# EAGLE board main-v4-2.1 (EAGLE 9.6.2)
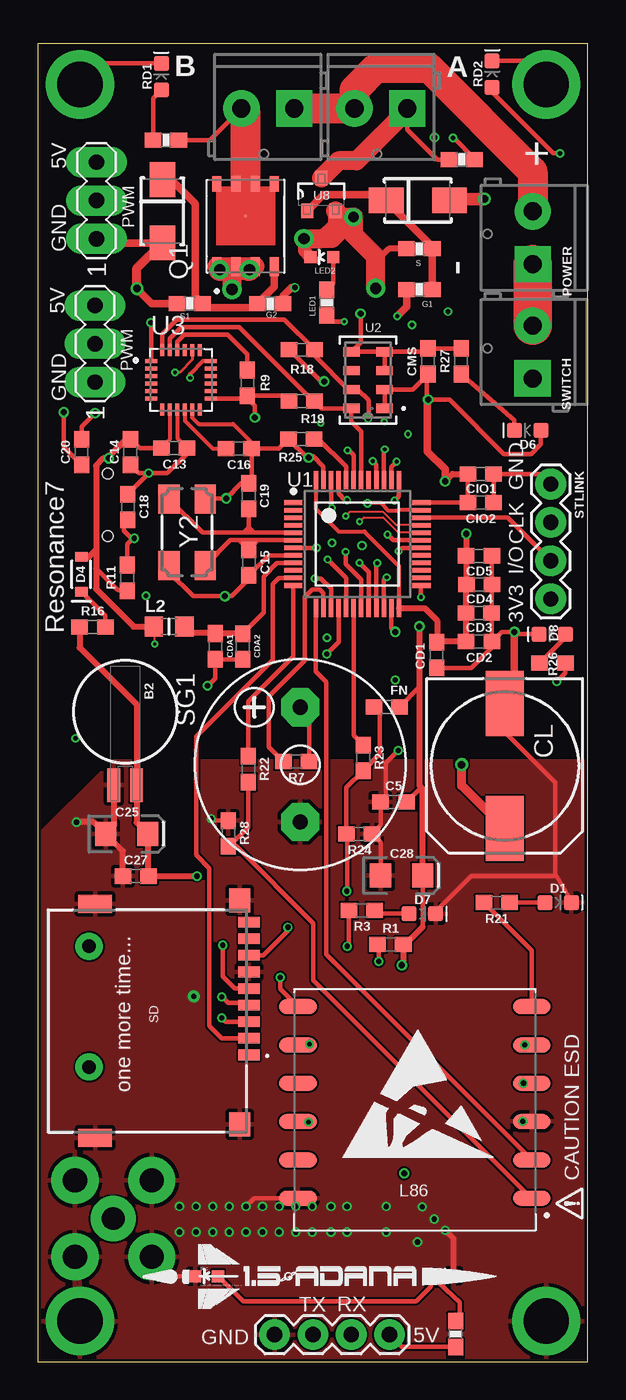
[diagram p0: board, top side]
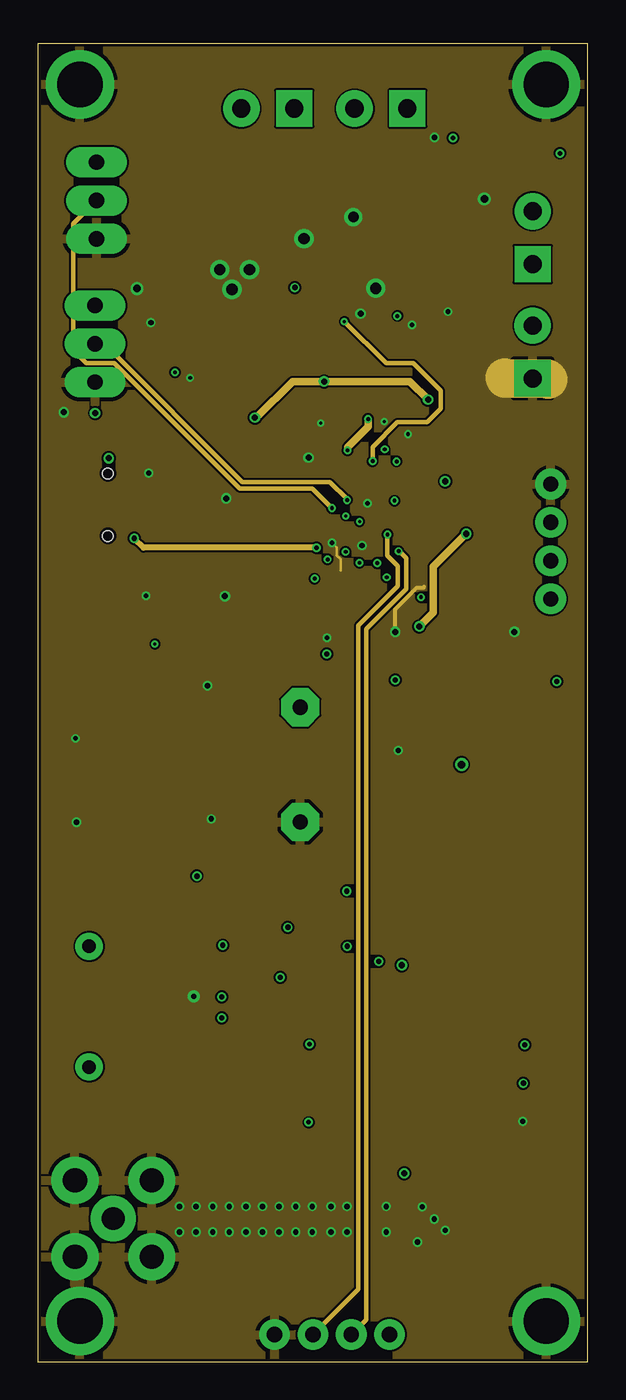
[diagram p1: board, inner layer Route2]
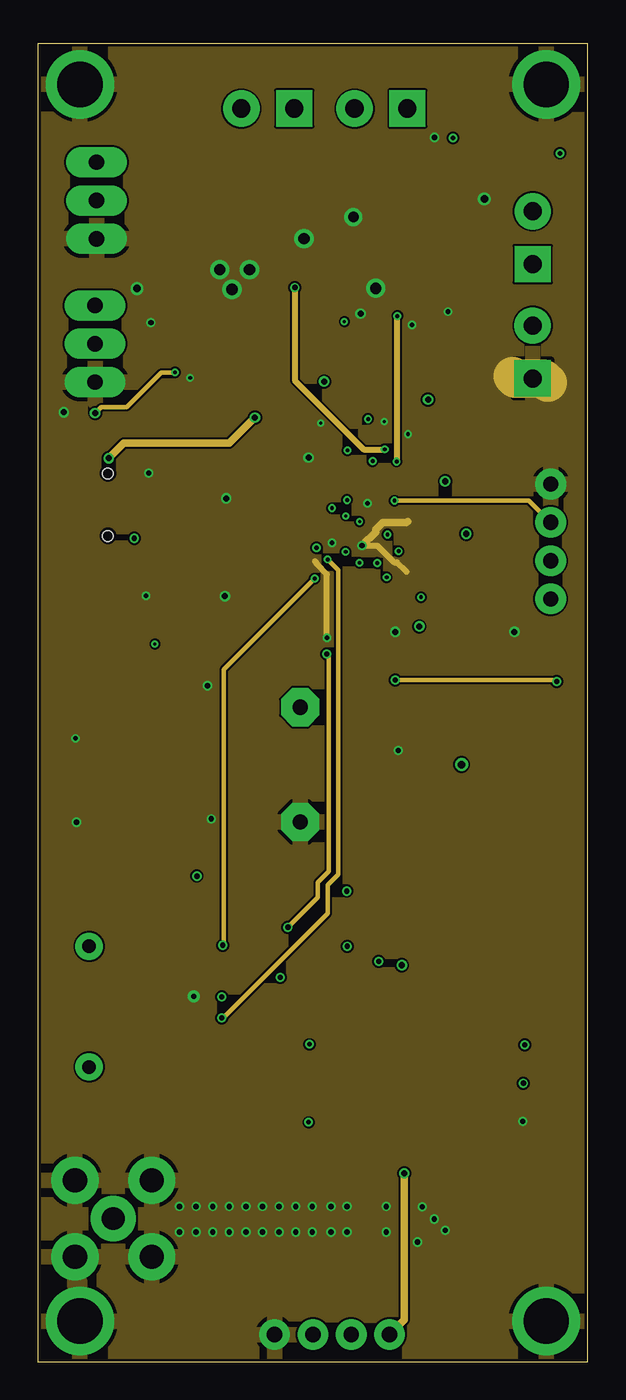
[diagram p2: board, inner layer Route15]
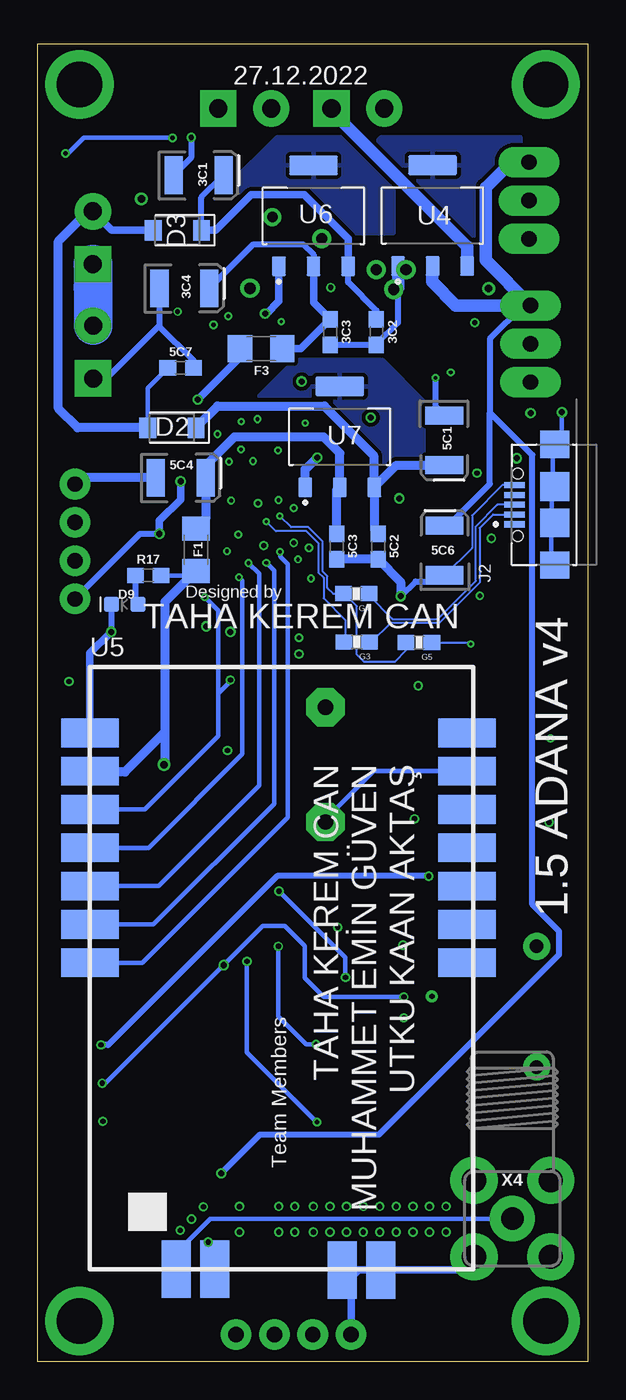
[diagram p3: board, bottom side, seen from below]

Size 36.47 x 87.4 mm. Coordinates in mm from the lower left corner, seen from the top.
Outline: 0,0 36.47,0 36.47,87.4 0,87.4 0,0
Copper layers (1+2*15+16): Top 0.035mm / dielectric 0.2104mm / Route2 0.0152mm / dielectric 1.065mm / Route15 0.0152mm / dielectric 0.2104mm / Bottom 0.035mm
Design rules "jlcpcb-4layers-edit *": minimum track width 3.5mil, minimum drill 0.2mm, track to track 5mil, track to pad 0.2mm, pad to pad 5mil, via to via 0.5mm, smd to smd 5mil, copper to edge 0.2mm, drill to drill 6mil, minimum pad ring 10mil, minimum via ring 0.13mm, stop-mask expansion 0.05mm, vias tented up to drill 0.25mm, thermal gap 10mil

## Footprints (pad centres in the part's own frame; a part is rotated, then mirrored left to right if it is on the bottom)
EIA3528 = smd 1.2 x 2.5: A 1.65,0; C -1.65,0
0603 = smd 1.1 x 1: 1 -0.85,0; 2 0.85,0
SCREWTERMINAL-3.5MM-2-NS = drill 1.2 pad 2.032 square: 1 0,0 | drill 1.2 pad 2.032: 2 3.5,0
0603-RES = smd 1.1 x 1: 1 -0.85,0; 2 0.85,0
BATTCON-6.8MM = smd 2.25 x 0.85: + 4.87,0.75; - 4.87,-0.75
EIA3216 = smd 1.4 x 1.6: + 1.4,0; - -1.4,0
150CLZ-1010 = smd 4.3 x 2.5: + 4.15,0; - -4.15,0
LED-0603 = smd 1 x 1: A -0.877,0; C 0.877,0
SODFL3718X115 = smd 1.115 x 1.361: 1 -1.6,0; 2 1.6,0
SOD-323 = smd 0.63 x 0.83: A 1.15,0; C -1.15,0
WE-TVSP_DO-214AC_UNIDIRECTIONAL = smd 2.3 x 1.7: 1 -2.1,0; 2 2.1,0
1206 = smd 1.6 x 1.8: 1 -1.4,0; 2 1.4,0
WE_629105136821 = smd 0.4 x 1.35: 1 -1.3,2.675; 2 -0.65,2.675; 3 0,2.675; 4 0.65,2.675; 5 1.3,2.675 | smd 1.8 x 1.9: S1 -4,0; S4 4,0 | smd 1.9 x 1.9: S2 -1.2,0; S3 1.2,0 | hole 0.7: -2.075,2.45; 2.075,2.45
RC-MASTER-SMD_L0805MP = smd 1.2 x 1.3: 1 -1.016,0; 2 1.016,0
XCVR_L86 = smd 2.5 x 1: 1 -7.75,6.35; 2 -7.75,3.81; 3 -7.75,1.27; 4 -7.75,-1.27; 5 -7.75,-3.81; 6 -7.75,-6.35; 7 7.75,-6.35; 8 7.75,-3.81; 9 7.75,-1.27; 10 7.75,1.27; 11 7.75,3.81; 12 7.75,6.35
LED-0603' = smd 0.8 x 0.8: A 0,-0.75; C 0,0.75
TRANS_SI7463DP = smd 1.27 x 0.61: 1 -2.67,1.905; 2 -2.67,0.635; 3 -2.67,-0.635; 4 -2.67,-1.905 | smd 1.02 x 0.61: 5 2.795,-1.905; 6 2.795,-0.635; 7 2.795,0.635; 8 2.795,1.905 | smd 0.15 x 0.15: 9 0.69,0
L-KLS1-TF-003-H1.85-R = smd 0.7 x 1.4: 1 2.25,10.6; 2 1.15,10.6; 3 0.05,10.6; 4 -1.05,10.6; 5 -2.15,10.6; 6 -3.25,10.6; 7 -4.35,10.6; 8 -5.45,10.6; 9 -6.55,10.6 | smd 1.6 x 1.4: 10 -8,10; 13 6.85,10 | smd 1.2 x 2.2: 11 -7.75,0.4; 12 7.75,0.4 | drill 0.9 pad 1.4: 14 3.05,0; 15 -4.95,0
F/CM12P = drill 1.016 pad 2.54 octagon: + 3.81,0; - -3.81,0
1X04 = drill 1.016 pad 1.88: 1 0,0; 2 2.54,0; 3 5.08,0; 4 7.62,0
MA03-1 = drill 1.016 long: 1 -2.54,0; 2 0,0; 3 2.54,0
STMICROELECTRONICS_STM32F072C8T6_0 = smd 1.2 x 0.3: 1 -4.25,2.75; 2 -4.25,2.25; 3 -4.25,1.75; 4 -4.25,1.25; 5 -4.25,0.75; 6 -4.25,0.25; 7 -4.25,-0.25; 8 -4.25,-0.75; 9 -4.25,-1.25; 10 -4.25,-1.75; 11 -4.25,-2.25; 12 -4.25,-2.75; 25 4.25,-2.75; 26 4.25,-2.25; 27 4.25,-1.75; 28 4.25,-1.25; 29 4.25,-0.75; 30 4.25,-0.25; 31 4.25,0.25; 32 4.25,0.75; 33 4.25,1.25; 34 4.25,1.75; 35 4.25,2.25; 36 4.25,2.75 | smd 0.3 x 1.2: 13 -2.75,-4.25; 14 -2.25,-4.25; 15 -1.75,-4.25; 16 -1.25,-4.25; 17 -0.75,-4.25; 18 -0.25,-4.25; 19 0.25,-4.25; 20 0.75,-4.25; 21 1.25,-4.25; 22 1.75,-4.25; 23 2.25,-4.25; 24 2.75,-4.25; 37 2.75,4.25; 38 2.25,4.25; 39 1.75,4.25; 40 1.25,4.25; 41 0.75,4.25; 42 0.25,4.25; 43 -0.25,4.25; 44 -0.75,4.25; 45 -1.25,4.25; 46 -1.75,4.25; 47 -2.25,4.25; 48 -2.75,4.25
SON8_MS5611_TEC = smd 1.092 x 0.61: 1 -1.1,1.875; 2 -1.1,0.625; 3 -1.1,-0.625; 4 -1.1,-1.875; 5 1.1,-1.875; 6 1.1,-0.625; 7 1.1,0.625; 8 1.1,1.875
QFN50P400X400X95-24N = smd 0.79 x 0.26: 1 -1.97,1.25; 2 -1.97,0.75; 3 -1.97,0.25; 4 -1.97,-0.25; 5 -1.97,-0.75; 6 -1.97,-1.25; 13 1.97,-1.25; 14 1.97,-0.75; 15 1.97,-0.25; 16 1.97,0.25; 17 1.97,0.75; 18 1.97,1.25 | smd 0.26 x 0.79: 7 -1.25,-1.97; 8 -0.75,-1.97; 9 -0.25,-1.97; 10 0.25,-1.97; 11 0.75,-1.97; 12 1.25,-1.97; 19 1.25,1.97; 20 0.75,1.97; 21 0.25,1.97; 22 -0.25,1.97; 23 -0.75,1.97; 24 -1.25,1.97
SOT229P700X180-4N = smd 0.93 x 1.31: 1 -2.29,-3.345; 2 0,-3.345; 3 2.29,-3.345 | smd 3.24 x 1.31: 4 0,3.345
E32-868T30S = smd 3.81 x 1.905: 3V3 12.3,5.08; AUX -12.7,7.62; GND@0 -12.7,12.7; GND@1 12.3,10.16; M0 -12.7,-2.54; M1 -12.7,0; PB0 12.3,-2.54; PB1 12.3,0; PB3 12.3,2.54; RST 12.3,12.7; RX -12.7,2.54; SWIM 12.3,7.62; TX -12.7,5.08; VCC -12.7,10.16 | smd 1.905 x 3.81: ANT -6.97,-22.86; GND@2 6.57,-22.91; GND@3 4.03,-22.91; GND@4 -4.43,-22.86
SOT95P240X112-3N = smd 0.972 x 0.802: D 1.092,0; G -1.092,0.94; S -1.092,-0.94
DELIK = drill 3 pad 4.5: P$1 0,0
SMA90_DIP = drill 1.5 pad 2.54: ANTENNA 0,0 | drill 1.6 pad 2.54: GND1 -2.54,2.54; GND2 2.54,2.54; GND3 -2.54,-2.54; GND4 2.54,-2.54
OSCCC500X320X110-4N = smd 1.9 x 1.4: 1 -2.2,-1.2; 2 2.2,-1.2; 3 2.2,1.2; 4 -2.2,1.2

## Placement (x,y rotation side)
3C1  22uF  [EIA3528]  25.8,78.68 0 bottom
3C2  100nF  [0603]  14.02,68.28 270 bottom
3C3  100nF  [0603]  17.09,68.27 270 bottom
3C4  22uF  [EIA3528]  26.75,71.18 0 bottom
5C1  22uF  [EIA3528]  9.53,61.1 270 bottom
5C2  100nF  [0603]  13.91,54.06 270 bottom
5C3  100nF  [0603]  16.66,54.06 270 bottom
5C4  22uF  [EIA3528]  26.99,58.62 0 bottom
5C6  22uF  [EIA3528]  9.5,53.8 90 bottom
5C7  100nF  [0603]  27,65.9 0 bottom
A  [SCREWTERMINAL-3.5MM-2-NS]  24.5,83.1 180 top
APGLED  4.7k  [0603-RES]  28.11,79.71 180 top
APGLED1  4.7k  [0603-RES]  8.5,81 0 top
B  [SCREWTERMINAL-3.5MM-2-NS]  17,83.1 180 top
B2  6.8MM_COIN_CELL  [BATTCON-6.8MM]  5.8,43.1 270 top
C5  100nF  [0603]  23.58,37.12 0 top
C13  100nF  [0603]  9.05,60.58 180 top
C14  10nF  [0603]  6.15,60.31 90 top
C15  25pF  [0603]  14,53 270 top
C16  100nF  [0603]  13.33,60.55 180 top
C18  0.1uF  [0603]  5.98,56.68 270 top
C19  25pF  [0603]  14,57.4 90 top
C20  2.2nF  [0603]  2.91,60.31 90 top
C25  4.7uF  [EIA3216]  5.9,35 0 top
C27  100nF  [0603]  6.5,32.2 0 top
C28  10uF  [EIA3216]  24.12,32.25 0 top
CD1  4.7uF  [0603]  26.44,46.86 90 top
CD2  0.1uF  [0603]  29.25,47.76 180 top
CD3  0.1uF  [0603]  29.24,49.66 180 top
CD4  0.1uF  [0603]  29.26,51.54 180 top
CD5  0.1uF  [0603]  29.25,53.44 180 top
CDA1  1uF  [0603]  11.78,47.44 270 top
CDA2  10nF  [0603]  13.58,47.43 270 top
CIO1  4.7uF  [0603]  29.36,58.86 180 top
CIO2  0.1uF  [0603]  29.36,56.98 180 top
CL  1000uF  [150CLZ-1010]  30.95,39.51 270 top
CMS  100nF  [0603]  25.87,66.34 90 top
D1  [LED-0603]  34.49,30.45 0 top
D2  B5819W  [SODFL3718X115]  27.58,61.93 180 bottom
D3  B5819W  [SODFL3718X115]  27.22,75.02 180 bottom
D4  0.5A/40V/420mV  [SOD-323]  2.89,52.21 90 top
D6  [LED-0603]  32.47,61.76 180 top
D7  [LED-0603]  25.5,29.7 0 top
D8  [LED-0603]  34.11,48.24 180 top
D9  [LED-0603]  30.71,50.23 180 bottom
ESDA  12V  [WE-TVSP_DO-214AC_UNIDIRECTIONAL]  25.2,77 0 top
ESDA1  12V  [WE-TVSP_DO-214AC_UNIDIRECTIONAL]  8.26,76.28 270 top
F1  1A  [1206]  25.98,53.84 270 bottom
F3  0.75A  [1206]  21.66,67.17 180 bottom
FN  1k  [0603]  23.14,43.42 180 top
G1  2.2K  [0603-RES]  25.3,71.1 180 top
G2  22  [0603-RES]  15.41,70.15 0 top
G3  22  [0603-RES]  15.32,47.73 180 bottom
G4  22  [0603-RES]  15.36,50.93 180 bottom
G5  22  [0603-RES]  11.2,47.7 180 bottom
J2  629105136821  [WE_629105136821]  2.2,56.83 90 bottom
L2  [RC-MASTER-SMD_L0805MP]  8.71,48.75 0 top
L86  L86  [XCVR_L86]  25,17.2 180 top
LED1  1k  [0603-RES]  19.17,70.22 90 top
LED2  RED  [LED-0603']  18.83,73.25 90 top
LED3  1k  [0603-RES]  27.7,1.84 90 top
LED5  GREEN  [LED-0603']  11.2,5.68 90 top
LED6  GREEN  [LED-0603']  26.81,5.69 270 top
POWER  [SCREWTERMINAL-3.5MM-2-NS]  32.81,72.78 90 top
Q1  SI7463DP  [TRANS_SI7463DP]  13.78,75.29 90 top
R1  1k  [0603]  23.38,27.67 0 top
R3  1k  [0603]  21.48,29.94 180 top
R7  1k  [0603]  17.14,39.8 180 top
R9  1k  [0603]  13.9,64.9 270 top
R11  1k  [0603]  5.93,51.98 90 top
R16  1k  [0603]  3.63,48.71 0 top
R17  1k  [0603]  29.15,52.14 0 bottom
R18  1k  [0603]  17.5,67.1 180 top
R19  1k  [0603]  17.5,63.7 180 top
R21  1k  [0603]  30.42,30.45 180 top
R22  1k  [0603]  13.96,39.29 270 top
R23  1k  [0603]  21.57,40.04 270 top
R24  1k  [0603]  21.31,35.01 180 top
R25  1k  [0603]  17.46,61.19 180 top
R26  1k  [0603]  34.12,46.34 0 top
R27  1k  [0603]  28.06,66.34 90 top
R28  1k  [0603]  12.64,35.04 270 top
RD1  Blue  [LED-0603]  8.19,85.21 90 top
RD2  Blue  [LED-0603]  30.12,85.38 90 top
S  3.3K  [0603-RES]  25.3,73.8 180 top
S1  4.7k  [0603-RES]  10.08,70.17 180 top
SD  L-KLS1-TF-003-H1.85-R  [L-KLS1-TF-003-H1.85-R]  3.4,22.6 270 top
SG1  F/CM12P  [F/CM12P]  17.4,39.6 90 top
STLINK  [1X04]  34,58.2 270 top
SV1  [MA03-1]  3.8,67.5 90 top
SV2  [MA03-1]  3.9,77 90 top
SWITCH  [SCREWTERMINAL-3.5MM-2-NS]  32.8,65.2 90 top
U1  STMICROELECTRONICS_STM32F072C8T6STMICROELECTRONICS_STM32F072C8T6_0_0  [STMICROELECTRONICS_STM32F072C8T6_0]  21.19,54.22 0 top
U2  MS561101BA03-50  [SON8_MS5611_TEC]  21.89,65.09 180 top
U3  MPU-6050  [QFN50P400X400X95-24N]  9.5,65.1 0 top
U4  AMS1117-5.0  [SOT229P700X180-4N]  10.3,76 0 bottom
U5  [E32-868T30S]  20.31,29 0 bottom
U6  AMS1117-3.3  [SOT229P700X180-4N]  18.19,75.98 0 bottom
U7  AMS1117-5.0  [SOT229P700X180-4N]  16.45,61.33 0 bottom
U8  SI2308CDS-T1-GE3  [SOT95P240X112-3N]  18.8,77.4 90 top
U$1  3MM  [DELIK]  2.8,2.7 0 top
U$2  3MM  [DELIK]  33.7,2.7 0 top
U$3  3MM  [DELIK]  2.8,84.7 0 top
U$5  3MM  [DELIK]  33.7,84.7 0 top
U$6  [ESD_10.00]  20.11,13.42 0 top
U$7  [1.5-2]  6.97,0.86 0 top
U$8  [ESD]  36.16,9.46 90 top
UART  [1X04]  15.7,1.8 0 top
X4  [SMA90_DIP]  5.01,9.49 0 bottom
Y2  ABM3B-26.000MHZ-10-1-U-T  [OSCCC500X320X110-4N]  9.9,55 270 top

## Library data of the parts
3C1 3C4 5C1 5C4 5C6 = SparkFun-Capacitors; PROD_ID: CAP-08310
3C2 3C3 5C2 5C3 5C7 C5 C13-C16 C18-C20 C27 CD1-CD5 CIO1 CIO2 = SparkFun-Capacitors; PROD_ID: CAP-00868
A B POWER SWITCH = SparkFun-Connectors; PROD_ID: CONN-08399
APGLED APGLED1 G1-G5 LED1 LED3 S S1 = SparkFun-Resistors; PROD_ID: RES-08296
B2 = SparkFun-Batteries; PROD_ID: BATT-13734
C25 C28 = SparkFun-Capacitors; PROD_ID: CAP-00811
CDA1 CDA2 CMS = SparkFun-Capacitors; PROD_ID: CAP-00810
CL X4 = adafruit
D1 D6-D9 = SparkFun-LED
D2 D3 = Diode; CATEGORY: Diode; DESCRIPTION: DIODE SCHOTTKY 20V 500MA SOD123; MANUFACTURER: ON Semiconductor; MPN: MBR0520LT1G; SUB-CATEGORY: Schottky
D4 = SparkFun-DiscreteSemi; PROD_ID: DIO-10955
ESDA ESDA1 = Wurth_EMC Components_WE-TVSP; DATASHEET-URL: https://www.we-online.com/catalog/datasheet/824500102.pdf; IPEAK: 2.5A; MOUNT: SMT; PART-NUMBER: 824500102; PDISS: 400W; VBR: 117V; VCLAMP: 162V
F1 F3 = SparkFun-Fuses; PROD_ID: RES-08585
FN R1 R3 R7 R9 R11 R16-R19 R21-R28 = SparkFun-Resistors; PROD_ID: RES-07856
J2 = 629105136821; AVAILABILITY: In Stock; DESCRIPTION: USB - micro B USB 2.0 Receptacle Connector 5 Position Surface Mount, Right Angle; MF: Würth Elektronik; MP: 629105136821; PACKAGE: None; PRICE: None; PURCHASE-URL: https://pricing.snapeda.com/search/part/629105136821/?ref=eda
L2 = 52101-101-REV-A_v16
L86 = L86; AVAILABILITY: Unavailable; DESCRIPTION: L86 is an ultra-compact GNSS POT (Patch on Top) module with an embedded 18.4mm × 18.4mm × 4.0mm patch antenna and utilizes the MediaTek new generation GNSS chipset MT3333 that achieves the perfect performance; MF: Quectel; MP: L86; PACKAGE: PowerSFN-8 Quectel; PRICE: None
LED2 LED5 LED6 = SparkFun-LED; PROD_ID: DIO-00819
Q1 = KARTSON-RE; AVAILABILITY: In Stock; DESCRIPTION: P-Channel 40 V 11A (Ta) 1.9W (Ta) Surface Mount PowerPAK® SO-8; MF: Vishay; MP: SI7463DP; PACKAGE: SO-8 Vishay; PRICE: None; PURCHASE-URL: https://pricing.snapeda.com/search/part/SI7463DP/?ref=eda
RD1 RD2 = SparkFun-LED; PROD_ID: DIO-11154
SD = L-KLS1-TF-003-H1.85-R; DESCRIPTION: Micro SD Card Connector; HEIGHT: mm; MANUFACTURER_NAME: KLS Electronic; MANUFACTURER_PART_NUMBER: L-KLS1-TF-003-H1.85-R
SG1 = buzzer; OC_FARNELL: unknown; OC_NEWARK: unknown
STLINK UART = SparkFun-Connectors; PROD_ID: CONN-09696
SV1 SV2 = con-lstb; OC_FARNELL: unknown; OC_NEWARK: unknown
U1 = STMicroelectronics - STM32F072C8T6; CENTROID_NOT_SPECIFIED: No; DATASHEET: https://upverter.com/datasheet/79bc43d7022f169b66e7860c54ba7646fa9c2dde.pdf; DIGIKEY_DESCRIPTION: IC MCU 32BIT 64KB FLASH 48LQFP; DIGIKEY_PART_NUMBER: STM32F072C8T6-ND; LEAD_FREE: yes; MF: STMicroelectronics; MOUSER_PART_NUMBER: 511-STM32F072C8T6; MPN: STM32F072C8T6; PACKAGE: LQFP48; PREFIX: U; ROHS: yes; TEMPERATURE_RANGE_HIGH: +85°C; TEMPERATURE_RANGE_LOW: -40°C
U2 = MS5611; BUILT_BY: EMA_UL_Team; COPYRIGHT: Copyright (C) 2016 Accelerated Designs. All rights reserved; DESCRIPTION: MS5611 BAROMETRIC SENSOR CM T&R; MANUFACTURER_PART_NUMBER: MS561101BA03-50; OUTPUT-SPAN: 24 bit ADC; PACKAGE: Surface Mountable; PRODUCT_DESCRIPTION: MS5611 BAROMETRIC SENSOR CM T&R; PRODUCT_TYPE: -; SENSOR_TYPE: Digital Pressure and Altimeter Sensor Modules; SOURCELIBRARY: TE_Connectivity-2018-03-16; SUPPLY_VOLTAGE: 1.8  3.6; TE_PART_NUMBER: MS561101BA03-50; VENDOR: TE Connectivity
U3 = MPU-6050; AVAILABILITY: Warning; DESCRIPTION: Accelerometer, Gyroscope, 6 Axis Sensor I²C Output; MF: TDK InvenSense; MP: MPU-6050; PACKAGE: QFN-24 InvenSense; PRICE: None; PURCHASE-URL: https://pricing.snapeda.com/search/part/MPU-6050/?ref=eda
U4 U6 U7 = AMS1117-3.3; AVAILABILITY: Unavailable; DESCRIPTION: Sot223/Pkg 1-Amp 3.3-Volt Low Drop Out Voltage Regulatator; MF: Advanced Monolithic Systems; MP: AMS1117-3.3; PACKAGE: SOT-89 ams; PRICE: None
U5 = E32-868T30S
U8 = IRLML6344TRPBF; AVAILABILITY: Good; DESCRIPTION: N-Channel 30V 5A (Ta) 1.3W (Ta) Surface Mount Micro3™/SOT-23; MF: Infineon Technologies; MP: IRLML6344TRPBF; PACKAGE: SOT-23 Multicomp; PRICE: None; PURCHASE-URL: https://pricing.snapeda.com/search/part/IRLML6344TRPBF/?ref=eda
U$1-U$3 U$5 U$7 U$8 = KARTSON-RE
U$6 = logo
Y2 = ABM3B-26.000MHZ-10-1-U-T; AVAILABILITY: Good; DESCRIPTION: 26MHz ±10ppm Crystal 10pF 50 Ohms 4-SMD, No Lead; MF: Abracon; MP: ABM3B-26.000MHZ-10-1-U-T; PACKAGE: SMD-4 Abracon LLC; PRICE: None; PURCHASE-URL: https://pricing.snapeda.com/search/part/ABM3B-26.000MHZ-10-1-U-T/?ref=eda

## Nets
3.3V: C5.2 C13.2 C14.2 C28.+ CD1.2 CD2.2 CD3.2 CD4.2 CD5.2 CIO1.2 CIO2.2 CMS.1 D4.A D6.A F3.2 FN.1 G5.1 L2.1 L86.4 R1.2 R9.2 R11.1 R18.2 R19.2 SD.4 STLINK.4 U1.24 U1.36 U1.48 U2.1 U2.2 U3.8 U3.13
5V: CL.+ F1.2 R17.2 U5.VCC
5VS: 5C6.A LED3.1 SV1.3 SV2.3 U4.2 UART.4
AUX: R26.2 U1.25 U5.AUX
BOOT: R25.1 U1.44
BUZZER: R7.2 U1.14
CS: SD.2 U1.11
DAT1: SD.8
DAT2: SD.1
DATA_N: G3.2 U1.32
DATA_P: G4.2 G5.2 U1.33
FIREA: G1.2 U1.38
FIREB: G2.2 U1.39
FN: R23.1 U1.18
GND: 3C1.C 3C2.2 3C3.2 3C4.C 5C1.C 5C2.2 5C3.2 5C4.C 5C6.C 5C7.2 B2.- C5.1 C13.1 C14.1 C15.2 C16.1 C18.1 C19.2 C20.1 C25.- C27.1 C28.- CD1.1 CD2.1 CD3.1 CD4.1 CD5.1 CDA1.2 CDA2.2 CIO1.1 CIO2.1 CL.- CMS.2 D1.C D7.C D8.C D9.C ESDA1.2 ESDA.2 J2.5 J2.S1 J2.S2 J2.S3 J2.S4 L86.3 L86.12 LED2.C LED5.C LED6.C Q1.1 Q1.2 Q1.3 R24.1 R25.2 R27.2 R28.1 RD1.C RD2.C S1.2 S.2 SD.6 SD.10 SD.11 SD.12 SD.13 SG1.- STLINK.1 SV1.1 SV2.1 SWITCH.1 U1.8 U1.23 U1.35 U1.47 U2.3 U2.4 U2.5 U3.1 U3.9 U3.11 U3.18 U4.1 U5.GND@0 U5.GND@1 U5.GND@2 U5.GND@3 U5.GND@4 U6.1 U7.1 U8.S U$1.P$1 U$2.P$1 U$3.P$1 U$5.P$1 UART.1 X4.GND1 X4.GND2 X4.GND3 X4.GND4 Y2.2 Y2.4
HT: U7.4
HT1: U4.4
HT2: U6.4
INT: U3.12
LED2: LED1.1 U1.40
M0: U1.19 U5.M0
M1: U1.20 U5.M1
MISO: SD.7 U1.16
MOSI: SD.3 U1.17
N$1: 5C1.A 5C2.1 D2.1 U7.3
N$2: ESDA.1 G1.1 S.1 U8.G
N$3: L86.10 R1.1
N$4: 5C3.1 5C4.A F1.1 U7.2
N$5: 3C1.A 3C2.1 D3.1 U6.3
N$6: 3C3.1 3C4.A F3.1 U6.2
N$7: U5.ANT X4.ANTENNA
N$8: APGLED.1 RD2.A
N$9: POWER.1 SWITCH.2
N$10: L86.6 R21.2
N$11: D1.A R21.1
N$12: D4.C R16.2
N$13: ESDA1.1 G2.1 Q1.4 S1.1
N$14: D9.A R17.1
N$15: D6.C R27.1
N$16: L86.8 R3.2
N$17: D7.A R3.1
N$18: C16.2 U3.10
N$19: APGLED1.1 RD1.A
N$21: D8.A R26.1
N$22: C20.2 U3.20
N$24: R7.1 SG1.+
N$25: J2.4
N$26: LED1.2 LED2.A
N$27: LED3.2 LED5.A LED6.A
N$30_N: G3.1 J2.2
N$30_P: G4.1 J2.3
N$34: SD.9
NF: FN.2 L86.7 R23.2 R24.2
OSCIN: C19.1 U1.5 Y2.1
OSCOUT: C15.1 U1.6 Y2.3
PIN22: R9.1 U3.22
PWM1: SV1.2 U1.45
PWM2: SV2.2 U1.46
RST: C18.2 R11.2 U1.7
RX1: U1.30 UART.3
RX2: L86.2 U1.13
RX3: U1.22 U5.TX
SCK: SD.5 U1.15
SCL: R19.1 U1.42 U2.8 U3.23
SDA: R18.1 U1.43 U2.7 U3.24
SWCLK: STLINK.2 U1.37
SWDIO: STLINK.3 U1.34
TX1: U1.31 UART.2
TX2: R22.1 U1.12
TX3: U1.21 U5.RX
TXD: L86.1 R22.2 R28.2
V_BCKP: B2.+ C25.+ C27.2 L86.5 R16.1
VAPG: A.1 APGLED.2 U8.D
VCC: 5C7.1 A.2 B.1 D2.2 D3.2 POWER.2 U4.3
VDDA: CDA1.1 CDA2.1 L2.2 U1.9
VMAIN: APGLED1.2 B.2 Q1.5 Q1.6 Q1.7 Q1.8 Q1.9
XANT: L86.11

## Tracks (layer width: path | path; a pad name or v marks a point on that pad's centre or on a via)
3.3V  (via drill 0.2, 0.35, 0.4)
  Top 0.127: v7.77,47.6 7.77,48.67 L2.1
  Top 0.254: U1.48 18.44,56.56 19.95,55.05 21.65,55.05 23.94,52.77 U1.24 | U3.8 8.75,61.13 C13.2
  Top 0.305: CD5.2 | 28.39,51.52 CD4.2 | CD3.2 | CD1.2 26.49,47.76 | R9.2 16.3,64.05 R19.2 | U2.1 U2.2 24.84,64.47 CMS.1 25.79,65.41 25.79,63.87 v25.87,63.79 27.31,63.79 30.9,60.2 32.7,60.2 33.35,60.85 D6.A | v18.98,65 18.78,65 16.68,67.1 R18.2 | R9.2 13.82,63.98 14.4,63.4 v14.4,62.6 | C28.+ 25.52,28.84 | L86.4 v32.19,18.47 | D4.A 2.91,53.38 | C5.2 25.41,38.09 | SD.4 13.87,23.78 12.62,23.78 v12.2,24.2 | CIO1.2 CIO2.2 U1.36 | R1.2 24.35,27.67 | R11.1 5.9,51.16 5.3,51.16 3.87,52.59 | C14.2 6.19,61.16 6.77,60.58 C13.2 | FN.1 25.3,44.73 25.3,45.23 | R9.2 13.7,63.85 U3.13
  Top 0.406: CD5.2 CD4.2 | CD3.2 28.39,51.52 | CD3.2 CD2.2 26.49,47.76 | v25.87,63.79 25.83,63.75 | v28.4,54.9 CD5.2 | L2.1 6.36,48.75 3.87,51.24 3.87,52.59 3.87,53.86 | C28.+ 25.52,37.98 25.41,38.09 25.3,38.2 25.3,45.23 v25.3,48.76 | v27,58.38 27.48,58.86 CIO1.2 | R1.2 24.23,26.39 v24.14,26.3 | 24.35,27.67 25.52,28.84 | CD1.2 26.48,47.75 26.48,49.14 25.65,49.97 U1.24 | 3.87,53.86 3.87,59.42 4.36,59.91 v4.71,59.91 4.71,60.02 5.85,61.16 C14.2 | D4.A 3.37,53.36 3.87,53.86
  Top 0.508: v27,58.38 27,59.2 25.83,60.36 25.83,63.75
  Route2 0.406: 14.5,62.6 v14.4,62.6
  Route2 0.508: v25.87,63.79 24.66,65 v18.98,65 16.9,65 14.5,62.6 | v25.3,48.76 26.23,49.69 26.23,52.73 v28.4,54.9
  Route15 0.508: v14.4,62.6 12.7,60.9 5.71,60.9 v4.71,59.91
  Bottom 0.127: G5.1 7.94,47.7 7.84,47.6 v7.77,47.6
  Bottom 0.305: v12.2,24.2 17.51,24.2 18.77,25.46 18.77,27.57 20.1,28.9 21.57,28.9 24.14,26.33 v24.14,26.3 32.02,18.42 32.14,18.42 v32.19,18.47
  Bottom 0.406: STLINK.4 29.68,54.9 v28.4,54.9
  Bottom 0.508: F3.2 23.06,66.6 v25.87,63.79 | v28.4,54.9 28.4,55.77 27,57.17 v27,58.38
5V  (via drill 0.5)
  Top 0.61: CL.+ 28.1,38.21 v28.1,39.6
  Bottom 0.305: R17.2 26.28,52.14 F1.2
  Bottom 0.61: F1.2 28.04,50.38 28.04,41.76 | U5.VCC 32.95,39.1 30.7,39.1 28.04,41.76 | 28.04,41.76 28.04,39.66 v28.1,39.6
5VS  (via drill 0.4)
  Top 0.305: UART.4 24.13,0.99 LED3.1
  Route15 0.508: v24.3,12.5 24.3,2.78 UART.4
  Bottom 0.305: 5C6.A 9.26,55.45
  Bottom 0.406: SV1.3 4.3,70.04 6.5,67.84 6.5,62.94 | 6.5,62.94 3.68,60.12 3.68,30.32 1.91,28.55 1.91,27 13.84,15.07 21.73,15.07 v24.3,12.5 | 6.5,62.94 6.5,58.21 9.26,55.45
  Bottom 0.61: U4.2 10.31,72.64 | 5.1,79.54 SV2.3
  Bottom 0.813: 10.31,72.64 10.31,71.6 8.75,70.04 SV1.3 6.79,73.03 6.79,77.85 5.1,79.54
AUX  (via drill 0.25, 0.35)
  Top 0.305: U1.25 25.4,51.43 v25.4,50.7 | R26.2 34.97,45.67 v34.4,45.1
  Route15 0.305: v23.7,45.2 34.3,45.2 v34.4,45.1
  Bottom 0.305: U5.AUX 29.38,36.62 24.5,41.5 24.5,44.3 | 24.5,44.3 24.5,49.8 v25.4,50.7 | 24.5,44.3 23.7,45.1 v23.7,45.2
BOOT
  Top 0.305: U1.44 20.44,59.36 18.61,61.19 R25.1
BUZZER
  Top 0.305: U1.14 18.94,50.96 18.7,51.2 18.2,51.2 17.7,50.7 17.7,46.51 15.31,44.12 15.31,40.75 16.27,39.8 R7.2
CS
  Top 0.305: U1.11 15.97,51.97 15.57,51.57 15.57,46.53 10.5,41.46 10.5,33.6 11.38,32.72 11.38,22.27 12.2,21.45 SD.2
DATA_N  (via drill 0.2)
  Top 0.127: U1.32 23.91,54.97 22.89,55.99 21.61,55.99 v21.33,55.71
  Bottom 0.127: v21.33,55.71 20.69,55.07 18.66,55.07 17.86,54.27 17.86,52.33 17.52,51.99 17.52,50.62 16.07,49.17 16.07,47.83 G3.2
DATA_P  (via drill 0.2)
  Top 0.127: U1.33 23.77,55.47 22.91,56.33 20.66,56.33 v20.42,56.09
  Bottom 0.127: v20.42,56.09 19.67,55.34 18.53,55.34 17.61,54.41 17.61,52.44 17.27,52.1 17.27,51.3 16.89,50.93 G4.2 16.14,50.93 15.32,50.11 15.32,46.89 14.84,46.41 12.82,46.41 12.05,47.18 G5.2
FIREA  (via drill 0.25)
  Top 0.305: v23.79,59.69 23.44,59.34 U1.38
  Top 0.508: G1.2 24.45,69.95 v23.84,69.34
  Route15 0.305: v23.84,69.34 23.8,69.3 | v23.79,59.69 v23.8,59.7
  Route15 0.406: 23.8,69.3 v23.8,59.7
FIREB  (via drill 0.25, 0.35)
  Top 0.305: U1.39 22.94,60.44 v23,60.5
  Top 0.508: v17.05,71.23 16.79,71.23 16.26,70.7 G2.2
  Route15 0.406: v17.05,71.23 17.05,65.06 21.61,60.5 v23,60.5
FN
  Top 0.305: U1.18 20.94,41.52 R23.1
GND  (via drill 0.2, 0.25, 0.3, 0.35, 0.35 pad 0.8, 0.4, 0.5, 0.7, 0.75)
  Top 0.254: U3.18 10.95,66.35 10.1,65.5 v10.1,65.24 | U3.11 10.24,62.62 10.68,62.18 12.96,62.18 14.18,60.95 C16.1 | U3.9 9.25,61.23 C13.1 | U1.35 23.95,56.47 23.9,56.42 23.27,56.42 22.77,56.92 v21.88,56.92 v21.87,56.93
  Top 0.305: CD5.1 CD4.1 30.11,49.98 30.1,49.97 CD3.1 | CD3.1 | CD2.1 CD3.1 | CD1.1 28.75,46.01 30.1,47.36 CD2.1 | CD2.1 30.74,48.4 v31.6,48.4 31.76,48.24 D8.C | 13.47,46.69 CDA2.2 CDA1.2 11.78,45.31 11.3,44.83 v11.25,44.83 | CIO2.1 CIO1.1 33.34,58.86 STLINK.1 | Y2.4 11.15,57.25 v12.5,57.25 13.5,58.25 C19.2 14.18,58.43 C16.1 15.97,60.55 R25.2 17.85,59.95 v17.95,59.95 18.05,60.05 18.26,60.05 18.94,59.37 U1.47 | Y2.2 8.7,52.37 10.31,50.76 v12.41,50.76 12.87,50.76 14,51.89 C15.2 15.32,53.47 U1.8 | U1.23 23.44,48.66 v23.7,48.4 | v21.4,69.5 21.4,67.58 U2.5 U2.4 | U2.4 25.64,66.97 CMS.2 R27.2 | v7.36,58.93 7.36,58.91 C18.1 | R28.1 11.61,35.89 v11.5,36 | D1.C 35.37,30.57 34.29,32.34 | 34.29,32.34 34.29,32.23 28.74,32.23 26.38,29.86 D7.C | 34.29,32.34 34.29,38.41 30.95,41.75 CL.- 31.6,44.31 | U3.1 7.53,68.87 v7.5,68.9 | U2.4 U2.3 | LED5.C 8.82,5.68 X4.GND3 | L86.12 14.35,10.85 v13.8,10.3 | RD2.C 32.14,86.26 U$5.P$1 | RD1.C 4.19,86.09 U$3.P$1 | C28.- 22.72,34.45 R24.1 22.73,35.58 C5.1 23.07,37.46 23.07,39.72 v23.89,40.54 | C14.1 6.68,58.93 v7.36,58.93 | C13.1 9.9,60.23 8.6,58.93 v7.36,58.93 | C20.1 1.73,60.65 v1.73,62.95
  Top 0.406: B2.- 5.05,35.55 C25.- | C27.1 5.65,33.85 C25.- | C25.- 3.72,35.78 v2.57,35.78 | C5.1 22.78,37.07 | 22.4,72.95 23.25,73.8 S.2 | LED6.C 27.56,8.18 v27.02,8.72
  Top 0.508: 31.6,44.31 v31.6,48.4 | S1.2 7.57,70.17 v6.58,71.16 | ESDA1.2 4.18,74.18 SV2.1
  Top 0.61: ESDA1.2 6.58,72.5 v6.58,71.16
  Top 0.813: ESDA.2 27.4,77.1 v29.6,77.1 | v17.65,74.47 17.65,73.68 LED2.C
  Top 1.016: U8.S 19.74,75.38 18.83,74.47
  Top 1.27: v22.4,71.18 22.4,72.95 22.4,73.27 20.92,74.75 v20.92,75.9 | v20.92,75.9 19.51,74.5 18.86,74.5 18.83,74.47 v17.65,74.47 | U8.S 20.15,75.9 v20.92,75.9 | v12.06,72.42 12.06,72.44 Q1.1 | v14.03,72.42 14.23,72.62 Q1.3 | Q1.2 12.87,72.34 v12.87,71.11
  Top 1.5: v14.03,72.42 13.97,72.42 13.9,72.49 12.13,72.49 v12.06,72.42
  Route2 0.152: 20.07,52.45 20.07,53.21 19.82,53.46 19.82,53.98 v19.5,54.3
  Route2 0.254: 25.6,51.38 25.56,51.34 25.14,51.34 23.7,49.9 v23.7,48.4
  Route2 2.54: 30.95,65.24 30.99,65.2 SWITCH.1 33.76,65.2 33.84,65.12
  Route15 0.406: 24.43,52.39 23.81,53.01 23.62,53.01 22.51,54.12 v21.49,54.12 | 18.37,53.08 18.48,52.97 18.48,52.9 19.16,52.21 v19.16,48.02
  Route15 0.508: v21.49,54.12 22.39,55.02 22.39,55.18 22.85,55.64 24.43,55.64 24.51,55.72
  Route15 2.54: 31.49,65.36 31.65,65.2 SWITCH.1 33.52,65.2 33.81,64.91
  Bottom 0.127: 5C6.C 7.68,53.97 7.68,56.11 5.64,58.16 4.9,58.16 J2.5
  Bottom 0.305: U5.GND@1 14.21,39.16 17.4,35.97 SG1.- | v1.73,62.95 1.73,61.66 2.41,60.97 J2.S4 2.32,60.74 2.32,58.12 J2.S3 2.39,58.01 2.39,55.65 J2.S2 2.42,55.62 2.42,52.84 J2.S1 | 2.47,41.35 v2.49,41.33
  Bottom 0.406: 3C4.C 28.4,68.72 28.43,68.69 | 3C3.2 3C2.2 14.02,67.47 12.59,68.9 12.59,71.22 | v26.3,81.18 26.3,79.83 3C1.C | 5C6.C 9.91,51.74 11.43,51.74 v12.41,50.76 | 28.43,68.69 26.15,66.4 5C7.2 | SWITCH.1 31.92,65.2 28.43,68.69 | D9.C 31.59,48.41 v31.6,48.4 | 5C1.C 10.1,63.32 v10.1,65.24
  Bottom 0.508: X4.GND3 8.41,6.09 U5.GND@2 15.2,6.09 | U5.GND@3 15.2,6.09 | U6.1 20.48,70.32 21.3,69.5 v21.4,69.5 | UART.1 15.7,5.59 15.2,6.09 | U5.GND@0 33.01,46.99 v31.6,48.4 | U5.GND@4 24.74,7.51 v25.17,7.94
  Bottom 0.61: U7.1 18.74,59.16 v17.95,59.95 | 5C3.2 5C2.2 12.41,51.71 v12.41,50.76 | 5C4.C 33.58,58.62 STLINK.1
  Bottom 0.813: U4.1 12.59,71.39 | 12.59,71.39 12.59,71.22 | 12.59,71.39 v12.87,71.11
  other vias: 11.6,8.6 10.5,8.6 9.4,8.6 10.5,10.3 9.4,10.3 11.6,10.3 12.7,8.6 12.7,10.3 13.8,8.6 14.9,8.6 14.9,10.3 16,8.6 17.1,8.6 18.2,8.6 20.5,10.3 20.5,8.6 23.1,10.3 23.1,8.6 25.49,10.27 26.28,9.47 24.82,68.76 10.34,24.23 24.55,61.51 19.44,8.6 19.44,10.3 7.17,50.79 27.19,69.63 16,10.3 17.1,10.3 18.2,10.3 22.97,62.34 18.75,62.24 32.15,15.94
  pour Route2: -0.9,0.5 -0.9,86.8 0.4,88.1 36,88.1 37.2,86.9 37.2,0 36.4,-0.8 0.4,-0.8
  pour Route15: -2.2,-2 -2.2,86.6 0.3,89.1 36.2,89.1 38.2,87.1 38.2,-0.8 37,-2
  pour Top: -0.57,0.67 -0.57,34.26 4.99,39.82 36.8,39.82 36.8,-0.37 0.47,-0.37
HT
  pour Bottom (isolate 0.254): 10.9,58.41 10.9,63.7 13.6,66.4 19.4,66.4 22.71,63.09 22.71,58.41
HT1
  pour Bottom (isolate 0.254): 6.55,73.45 14,80.9 13.7,81.2 4.5,81.2 4.5,75.5
HT2
  pour Bottom (isolate 0.254): 12.9,74.82 12.9,77.9 16.2,81.2 20.6,81.2 23.9,77.9 23.9,74.82
LED2  (via drill 0.2, 0.25)
  Top 0.305: U1.40 22.44,59.48 22.27,59.65 v22.2,59.72 | v20.33,68.97 19.57,68.97 LED1.1
  Route2 0.305: v20.33,68.97 23.1,66.21 24.89,66.21 26.72,64.38 26.72,63.2 25.81,62.29 23.84,62.29 22.2,60.66 v22.2,59.72
M0  (via drill 0.25)
  Top 0.305: v20.41,53.7 20.41,52.91 21.44,51.88 U1.19
  Bottom 0.305: U5.M0 29.54,26.46 19.9,36.1 19.9,52.88 20.41,53.39 v20.41,53.7
M1  (via drill 0.25)
  Top 0.305: v21.32,52.98 21.94,52.36 U1.20
  Bottom 0.305: U5.M1 28.8,29 20.8,37 20.8,52.46 v21.32,52.98
MISO  (via drill 0.35)
  Top 0.305: U1.16 19.94,47.72 v19.15,46.93 | SD.7 14.95,26.95 16.58,28.58 v16.58,28.81
  Route15 0.305: v19.15,46.93 19.29,46.79 19.29,32.52 18.56,31.79 18.56,30.79 v16.58,28.81
MOSI  (via drill 0.25, 0.35)
  Top 0.305: U1.17 20.44,51.98 v19.22,53.2 | SD.3 12.45,22.55 v12.2,22.8
  Route15 0.305: v19.22,53.2 19.22,53.18 19.91,52.49 19.91,32.32 19.22,31.63 19.22,29.72 12.3,22.8 v12.2,22.8
N$1
  Bottom 0.61: U7.3 12.7,59.45 5C1.A | U7.3 14.16,55.16 5C2.1 | D2.1 24.54,63.37 17.47,63.37 14.2,60.1 14.2,58.02 U7.3
N$2
  Top 0.305: S.1 26.15,73.95
  Top 0.508: U8.G 18.92,77.37 22.73,77.37 ESDA.1 26.15,73.95 | G1.1 S.1
N$3  (via drill 0.3, 0.35)
  Top 0.305: R1.1 22.6,27.6 v22.6,26.55 | v17.96,15.88 17.91,15.93 L86.10
  Bottom 0.305: v22.6,26.55 22.6,20.52 v17.96,15.88
N$4
  Bottom 0.61: 5C3.1 16.66,57.77 U7.2 16.45,60.25 17.52,61.32 23.44,61.32 25.34,59.42 5C4.A 25.34,55.88 F1.1
N$5
  Bottom 0.406: 3C2.1 14.02,69.7 15.9,71.58 U6.3 | D3.1 25.62,77.21 3C1.A
  Bottom 0.508: D3.1 24.68,75.02 22.32,77.38 18.8,77.38 15.9,74.47 U6.3
N$6
  Bottom 0.406: 3C4.A 22.18,74.1 18.89,74.1 18.19,73.4 U6.2
  Bottom 0.508: U6.2 18.19,70.22 3C3.1 19.04,67.17 F3.1
N$7
  Bottom 0.152: U5.ANT 27.28,7.24
  Bottom 0.293: 27.28,7.24 25.03,9.49 X4.ANTENNA
N$8  (via drill 0.3)
  Top 0.305: RD2.A 30.12,84.17 34.16,80.13 v34.62,80.13 | APGLED.1 28.96,79.75 27.56,81.15 v27.52,81.15
  Bottom 0.305: v34.62,80.13 34.53,80.04 33.42,81.15 v27.52,81.15
N$9
  Top 2: SWITCH.2
  Top 2.54: POWER.1 SWITCH.2
  Bottom 2.54: POWER.1 32.8,71.09 | SWITCH.2 32.8,71.25 32.82,71.27
N$10
  Top 0.305: R21.2 32.75,27.27 L86.6
N$11
  Top 0.305: D1.A R21.1
N$12
  Top 0.305: R16.2 4.48,49.47 D4.C
N$13
  Top 0.508: Q1.4 15.69,71.28 G2.1 14.29,69.89 11.21,69.89 S1.1 10.45,70.65 10.45,76.78 8.97,78.26 8.26,78.26
  Top 0.61: 8.26,78.26 ESDA1.1
N$14
  Bottom 0.406: R17.1 30,50.4 D9.A
N$15
  Top 0.305: D6.C 31.59,62.42 R27.1
N$16  (via drill 0.3, 0.35)
  Top 0.305: R3.2 20.63,27.66 v20.52,27.55 | v18.02,21.05 17.98,21.01 L86.8
  Bottom 0.305: v20.52,27.55 20.52,22.9 18.67,21.05 v18.02,21.05
N$17
  Top 0.305: D7.A 24.58,29.74 22.53,29.74 R3.1
N$18
  Top 0.254: C16.2 11.6,60.55 9.75,62.4 U3.10
N$19
  Top 0.305: APGLED1.1 7.65,83.79 RD1.A
N$21
  Top 0.305: R26.1 34.99,48.06 D8.A
N$22  (via drill 0.25, 0.4)
  Top 0.203: U3.20 10.25,66.45 9.4,65.6 v9.1,65.6
  Top 0.305: v3.8,62.9 2.91,62.01 C20.2
  Route15 0.305: v9.1,65.6 8.2,65.6 5.9,63.3 4.2,63.3 v3.8,62.9
N$24
  Top 0.305: SG1.+ 17.99,42.82 R7.1
N$26
  Top 0.305: LED2.A 19.58,71.48 LED1.2
N$27
  Top 0.305: LED3.2 27.96,2.95 27.96,3.95 LED6.A 26.06,4.99 25.07,4 13.61,4 11.95,5.66 LED5.A
N$30_N
  Bottom 0.127: G3.1 14.35,47.73 13.08,49 9.85,49 7.18,51.67 7.18,55.29 6.29,56.18 J2.2
N$30_P
  Bottom 0.127: G4.1 14.51,50.79 12.97,49.25 9.95,49.25 7.43,51.77 7.43,55.4 6,56.83 J2.3
NF  (via drill 0.35)
  Top 0.305: v20.48,31.21 20.52,31.25 20.52,34.95 R24.2 20.46,38.08 R23.2 22.68,40.3 22.68,43.03 FN.2 | v16.07,25.48 16.07,24.73 L86.7
  Bottom 0.305: v20.48,31.21 16.07,26.8 v16.07,25.48
OSCIN
  Top 0.305: U1.5 14.3,54.97 | 14.3,54.97 14,54.97 | 14,54.97 13.67,54.97 | 13.67,54.97 10.93,54.97 Y2.1 | C19.1 14,55.3 | 14,54.97 14,55.3 | 14,55.3 13.67,54.97 | 14,55.3 14.3,55 14.3,54.97
OSCOUT
  Top 0.305: Y2.3 12.77,54.47 13.4,54.47 | 13.4,54.47 14,54.47 | 14,54.47 14.6,54.47 | 14.6,54.47 U1.6 | C15.1 14,54.47 | C15.1 13.4,54.45 13.4,54.47 | C15.1 14,53.87 14.6,54.47
PIN22
  Top 0.305: R9.1 13.9,66.8 12.6,68.1 9.72,68.1 9.25,67.63 U3.22
PWM1  (via drill 0.25)
  Top 0.305: U1.45 19.94,57.56 20.36,57.14 v20.51,57.14
  Route2 0.305: v20.51,57.14 20.51,57.2 19.37,58.34 13.56,58.34 4.4,67.5 SV1.2
PWM2  (via drill 0.25)
  Top 0.3: U1.46 19.44,56.66
  Top 0.305: 19.44,56.66 v19.5,56.6
  Route2 0.305: SV2.2 2.36,75.46 2.36,67.1 3.23,66.23 5.06,66.23 13.38,57.91 18.19,57.91 v19.5,56.6
RST  (via drill 0.3, 0.35)
  Top 0.305: U1.7 v18.47,53.97 v18.48,53.98 | C18.2 5.69,55.54 5.69,55.13 6.22,54.6 v6.4,54.6 6.3,54.6 5.93,54.23 R11.2
  Route2 0.406: v18.48,53.98 7.02,53.98 v6.4,54.6
RX1  (via drill 0.25)
  Top 0.305: U1.30 24.14,53.97 v23.92,53.75
  Route2 0.305: v23.92,53.75 23.97,53.75 24.44,53.28 24.44,51.24 21.78,48.58 21.78,2.8 UART.3
RX2
  Top 0.305: L86.2 19.14,27 19.14,45.07 18.44,45.77 U1.13
RX3  (via drill 0.25)
  Top 0.305: U1.22 22.94,51.83 v23.13,52.02
  Bottom 0.305: U5.TX 29.12,34.08 22.9,40.3 22.9,51.79 v23.13,52.02
SCK  (via drill 0.25, 0.35)
  Top 0.305: U1.15 19.44,51.26 18.77,51.93 v18.36,51.93 | SD.5 13.05,24.75 12.26,25.54 v12.26,27.62
  Route15 0.305: v18.36,51.93 12.34,45.91 12.34,27.7 v12.26,27.62
SCL
  Top 0.305: 20.94,63.06 U2.8 | U2.8 18.84,63.22 R19.1 18.25,63.7 13.35,68.6 9.5,68.6 8.75,67.85 U3.23 | U1.42 21.44,61.67 20.79,62.32 U2.8
SDA  (via drill 0.25)
  Top 0.305: U3.24 8.25,68.15 9.2,69.1 16.36,69.1 R18.1 18.35,66.7 20.59,64.47 U2.7 21.22,64.47 21.93,63.76 21.93,62.54 v21.9,62.51 | U1.43 20.94,60.13 20.64,60.43 v20.54,60.43
  Route2 0.508: v20.54,60.43 20.54,60.64 21.9,62 v21.9,62.51
SWCLK  (via drill 0.25)
  Top 0.305: U1.37 23.93,57.38 v23.65,57.1
  Route15 0.305: STLINK.2 32.56,57.1 v23.65,57.1
SWDIO
  Top 0.305: STLINK.3 31.15,55.97 U1.34
TX1  (via drill 0.25)
  Top 0.305: U1.31 23.56,54.47 v23.18,54.85
  Route2 0.305: v23.18,54.85 23.18,53.45 23.87,52.76 23.87,51.42 21.26,48.81 21.26,4.82 UART.2
TX2
  Top 0.305: U1.12 16.94,46.77 13.96,43.79 R22.1
TX3  (via drill 0.25)
  Top 0.305: v22.5,52.96 22.44,52.9 U1.21
  Bottom 0.305: U5.RX 28.46,31.54 21.8,38.2 21.8,52.26 v22.5,52.96
TXD
  Top 0.305: R22.2 13.96,35.44 12.71,34.19 R28.2 13.15,34.19 18.27,29.07 18.27,25.28 32.7,10.85 L86.1
V_BCKP  (via drill 0.35)
  Top 0.406: v32.28,21.01 L86.5 | v10.55,32.2 C27.2 7.3,32.25 C25.+ 6.55,35.75 B2.+ 6.55,43.58 2.78,47.35 R16.1
  Bottom 0.305: v32.27,21 v32.28,21.01
  Bottom 0.406: v10.55,32.2 20.61,32.2 31.21,21.6 31.81,21 v32.27,21
VAPG
  Top 0.305: A.1 24.5,81.7 26.49,79.71 APGLED.2
  Top 1.27: A.1 24.5,82.99 21.14,79.63 19.94,79.63 U8.D
VCC
  Top 2: B.1 A.2 21,84.34 22.45,85.79 25.94,85.79 32.81,78.92 POWER.2
  Bottom 0.305: 5C7.1 29.18,64.57 D2.2
  Bottom 0.508: POWER.2 31.55,75.02 D3.2
  Bottom 0.61: D2.2 33.82,61.93 35.1,63.21 35.1,74.29 33.11,76.28 POWER.2 | B.1 17,82.95 | U4.3
  Bottom 0.813: 17,82.95 8,73.95 U4.3
VDDA
  Top 0.305: U1.9 15.86,52.97 14.97,52.08 14.97,49.67 CDA2.1
  Top 0.406: L2.2 10.17,48.31 11.76,48.31 CDA1.1 13.56,48.3 CDA2.1
VMAIN
  Top 0.305: B.2 11.4,81 APGLED1.2
  Top 1.5: 13.78,82.82 B.2
  Top 2: Q1.9 13.78,82.82

## Text on the board
tPlace: 5V | PWM | GND | 5V | PWM | GND | Resonance7 | one more time... | CAUTION ESD
bPlace: 27.12.2022 | Designed by | TAHA KEREM CAN | TAHA KEREM CAN / MUHAMMET EMİN GÜVEN / UTKU KAAN AKTAŞ | Team Members
tNames: + | - | GND | CLK | I/O | 3V3 | TX | RX | GND | 5V
bNames: 1.5 ADANA v4
204bmp: v4 Story of the name: / 1.5 Adana's first 4 layer PCB / Features: / -USB / -SMD LoRa / -2 Servo Channel / -2 Deployment (25A,6A) / -External Uart / -all SMD / -independent power system / -GPS / -MPU / -Pressure sens